# Altium PCB Exp 7.PcbDoc
Units mm, origin at the board's own origin, x right, y up, seen from the top; angles counter-clockwise.
Board outline 152.4 x 101.6 mm, 2 copper layers (Top Layer, Bottom Layer); 31 components, 37 nets, 156 pads, 0 vias.
Unrouted connection lines stored in the file: 14.
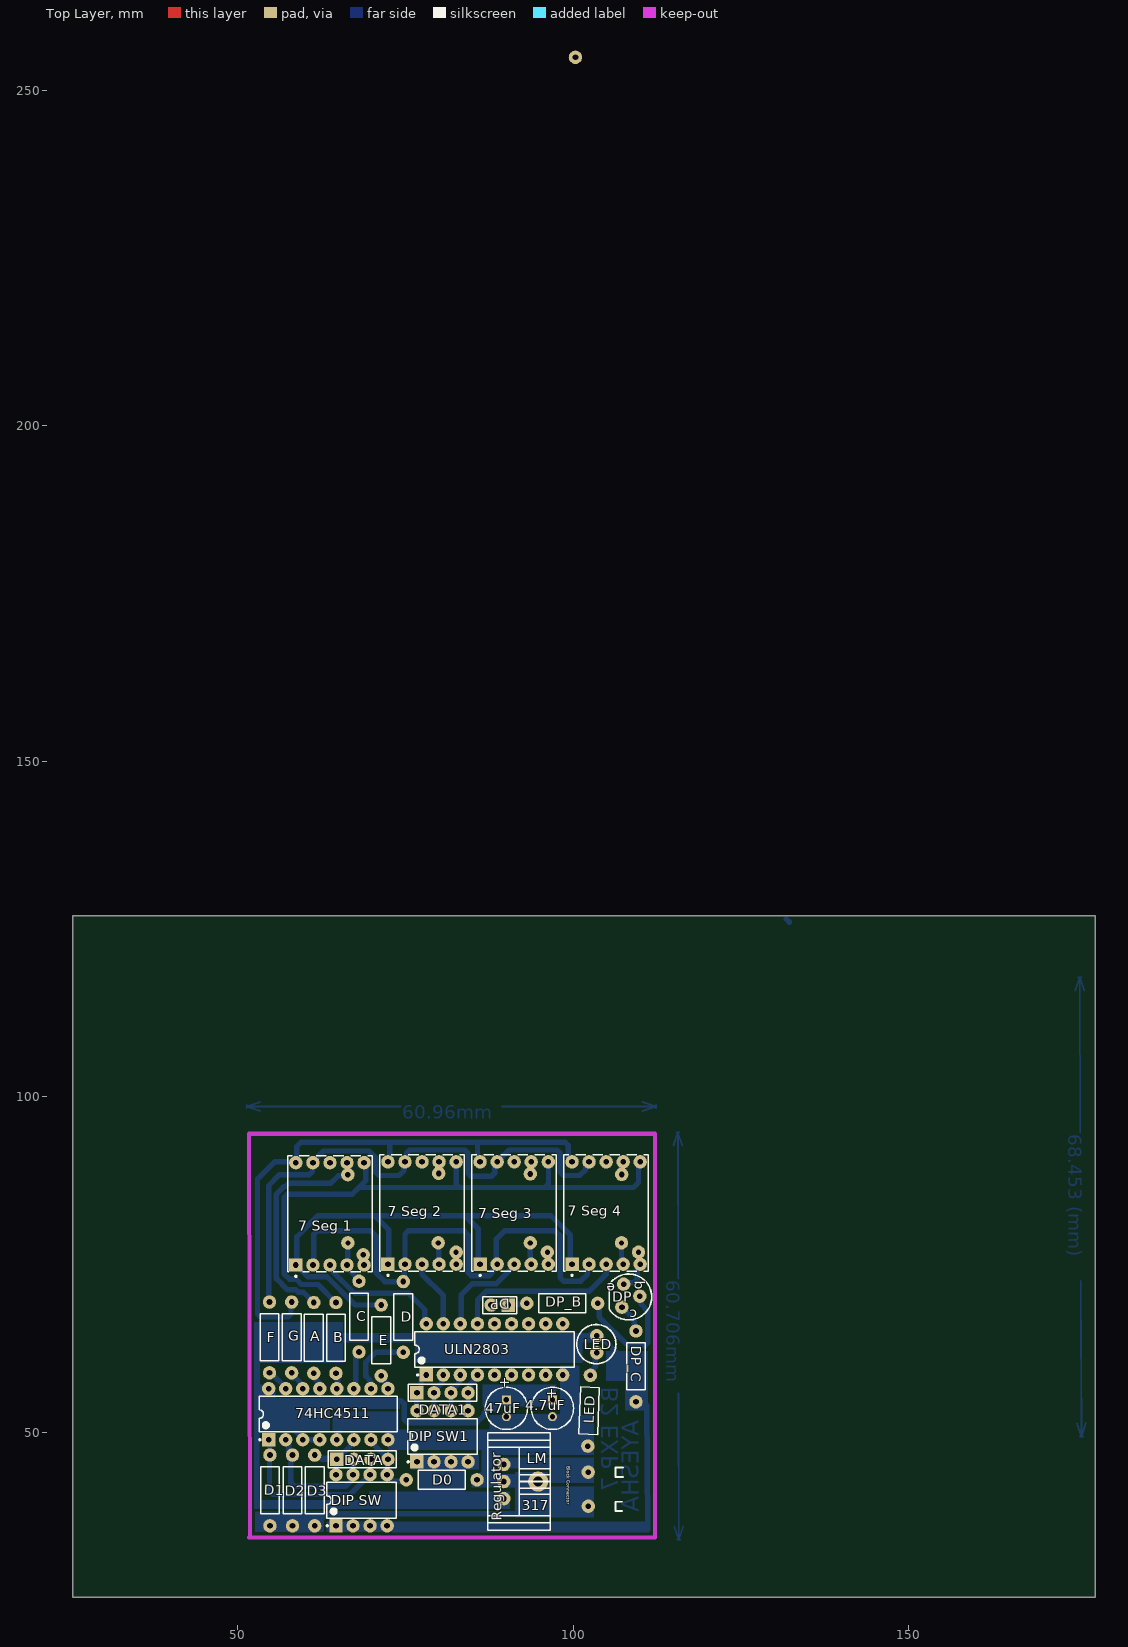
[diagram p0: Top Layer view]
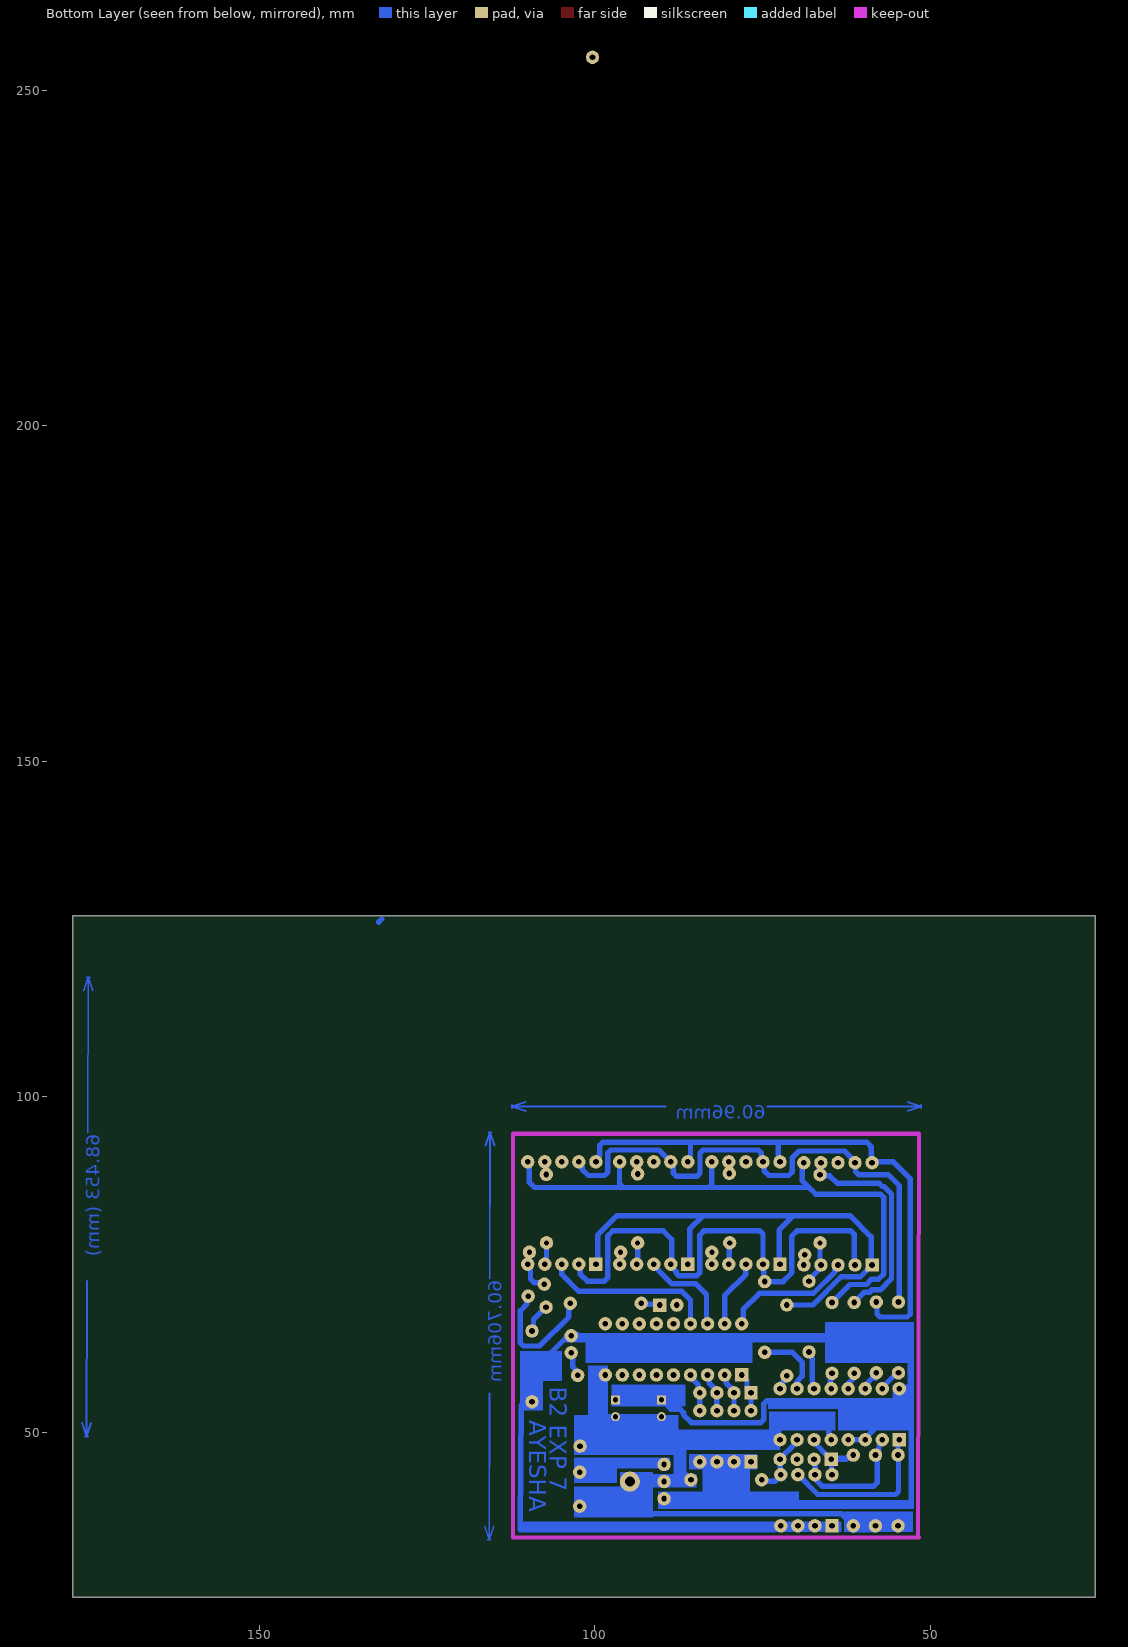
[diagram p1: Bottom Layer view, seen from below]

## Layer stack, top to bottom
Top Solder: solder mask 0.0102, Solder Resist, Dk 3.5
Top Layer: signal copper 0.0356
Dielectric 1: dielectric 0.32, FR-4, Dk 4.8
Bottom Layer: signal copper 0.0356
Bottom Solder: solder mask 0.0102, Solder Resist, Dk 3.5

## Board outline
25.4,25.4 177.8,25.4 177.8,127 25.4,127

## Design rules (kind name [scope] priority, off if disabled: settings)
Clearance [All] p1: gap=0.35 ignorepadtopadclearanceinfootprint=FALSE
PlaneClearance [All] p1: clearance=0.85
PolygonConnect [All] p1: connectstyle=Direct reliefconductorwidth=0.254 reliefentries=4 polygonreliefangle="90 Angle" airgapwidth=0.254
RoutingVias [All] p1: holewidth=0.711 width=1.27 viastyle="Through Hole" minholewidth=0.711 minwidth=1.27 maxholewidth=0.711 maxwidth=1.27
SolderMaskExpansion [All] p1: expansion=0.102 istentingtop=FALSE
Width [All] p1: maxlimit=0.8 minlimit=0.8 preferedwidth=0.8
29 further rules are at their usual default settings.

## Components (designator, comment, footprint, x,y, rotation, side; value= is the part's Value field where it differs from the comment)
4.7uF "Comment" CAPPR2.5-6.3x15 96.901,53.574 r270 top
"7 Seg 1" "Comment" LEDDIP-10/14.27RHD 63.75,82.55 r0 top
"7 Seg 2" "Comment" LEDDIP-10/14.27RHD 77.47,82.677 r0 top
"7 Seg 3" "Comment" LEDDIP-10/14.27RHD 91.2,82.677 r0 top
"7 Seg 4" "Comment" LEDDIP-10/14.27RHD 104.902,82.677 r0 top
47uF "Comment" CAPPR2.5-6.3x15 90.043,53.574 r270 top
74HC4511 "Comment" DIP-16 63.5,52.7 r90 top
A "Comment" RES10.55-7X2.8#1 61.341,64.067 r90 top
B "Comment" RES10.55-7X2.8#1 64.643,64.067 r90 top
C "Comment" RES10.55-7X2.8#1 68.072,67.25 r90 top
D "Comment" RES10.55-7X2.8#1 74.676,67.183 r90 top
D0 "Comment" RES10.55-7X2.8#1 80.391,42.926 r0 top
D1 "Comment" RES10.55-7X2.8#1 54.8,41.338 r270 top
D2 "Comment" RES10.55-7X2.8#1 58.166,41.33 r90 top
D3 "Comment" RES10.55-7X2.8#1 61.468,41.33 r90 top
DATA "Comment" HDR1X4 64.77,45.974 r0 top
DATA1 "Comment" HDR1X4 76.708,55.88 r0 top
"DIP SW" "Comment" DIP-8 68.453,39.878 r90 top
"DIP SW1" "Comment" DIP-8 80.518,49.403 r90 top
DP "Comment" HDR1X2 90.297,68.961 r180 top
DP "Comment" "TO-92 Packaging" 108.585,70.358 r180 top
DP_B "Comment" RES10.55-7X2.8#1 98.357,69.215 r180 top
DP_C "Comment" RES10.55-7X2.8#1 109.347,59.817 r270 top
E "Comment" RES10.55-7X2.8#1 71.374,63.695 r90 top
F "Comment" RES10.55-7X2.8#2 54.737,64.135 r90 top
G "Comment" RES10.55-7X2.8#3 58.039,64.135 r90 top
LED "Comment" RES10.55-7X2.8#1 102.362,53.213 r88 top
LED "Comment" LED 103.505,63.119 r180 top
Regulator "Comment" "LM317 with Heat Sink" 89.662,42.662 r270 top
ULN2803 "Comment" DIP-18 88.265,62.357 r90 top
? "Comment" "PCB Block Connector" 102.489,41.529 r270 top

## Footprints (in the part's own frame and the unit in brackets; to place one, negate y for a bottom-side part, rotate by r counter-clockwise, add the part's x,y. Pads: shape width x height; smd on the part's side, far side on the other; paste and mask are expansions set on the pad)
CAPPR2.5-6.3x15 [mm] "Capacitor, Electrolytic, Radial; Body 6.3 x 15 mm (Dia.xH typ); Pin Spacing 2.5 mm (typ)"
  rect 1.35x1.35 hole 0.8: 1(-1.25,0)
  round 1.35 hole 0.8: 2(1.25,0)
  silkscreen extent -3.15,-3.15 3.15,3.15
DIP-8 [mm] "DIP, 8-Pin, Row Spacing 7.62 mm, Pitch 2.54 mm"
  rect 2x2 hole 0.85: 1(-3.81,3.81)
  round 2 hole 0.85: 2(-3.81,1.27) 3(-3.81,-1.27) 4(-3.81,-3.81) 5(3.81,-3.81) 6(3.81,-1.27) 7(3.81,1.27) 8(3.81,3.81)
  silkscreen extent -3.93,-5.15 2.65,5.23, body extent -3.6,-5.15 3.6,5.15, height 5.33
DIP-16 [mm] "DIP; 16 Leads; Row Spacing 7.62 mm; Pitch 2.54 mm"
  rect 2x2 hole 0.85: 1(-3.81,8.89)
  round 2 hole 0.85: 2(-3.81,6.35) 3(-3.81,3.81) 4(-3.81,1.27) 5(-3.81,-1.27) 6(-3.81,-3.81) 7(-3.81,-6.35) 8(-3.81,-8.89) 9(3.81,-8.89) 10(3.81,-6.35) 11(3.81,-3.81) 12(3.81,-1.27) 13(3.81,1.27) 14(3.81,3.81) 15(3.81,6.35) 16(3.81,8.89)
  silkscreen extent -3.93,-10.3 2.65,10.31, body extent -3.6,-10.28 3.6,10.28, height 5.08
DIP-18 [mm] "DIP; 18 Leads; Row Spacing 7.62 mm; Pitch 2.54 mm"
  rect 2x2 hole 0.85: 1(-3.81,10.16)
  round 2 hole 0.85: 2(-3.81,7.62) 3(-3.81,5.08) 4(-3.81,2.54) 5(-3.81,0) 6(-3.81,-2.54) 7(-3.81,-5.08) 8(-3.81,-7.62) 9(-3.81,-10.16) 10(3.81,-10.16) 11(3.81,-7.62) 12(3.81,-5.08) 13(3.81,-2.54) 14(3.81,0) 15(3.81,2.54) 16(3.81,5.08) 17(3.81,7.62) 18(3.81,10.16)
  silkscreen extent -3.93,-11.85 2.65,11.85, body extent -3.6,-11.8 3.6,11.8, height 5.08
HDR1X2 [mm] "Connector; Header; 2 Position"
  rect 2x2 hole 0.85: 1(0,0)
  round 2 hole 0.85: ""(2.54,0)
  silkscreen extent -1.27,-1.27 3.81,1.27
HDR1X4 [mm] "Connector; Header; 4 Position"
  rect 2x2 hole 0.85: 1(0,0)
  round 2 hole 0.85: 2(2.54,0) 3(5.08,0) 4(7.62,0)
  silkscreen extent -1.27,-1.27 8.89,1.27
LED [mm]
  round 2 hole 0.85: 1(0,1.27) 2(0,-1.27)
  silkscreen extent -2.87,-2.95 2.98,2.89
LEDDIP-10/14.27RHD [mm] "LED, 7-Segment Display, 14.27 mm, RHD; 10 Leads; Row Space 15.24 mm; Pitch 2.54 mm"
  rect 2x2 hole 0.85: 1(-5.08,-7.62)
  round 2 hole 0.85: 2(-2.54,-7.62) 3(0,-7.62) 4(2.54,-7.62) 5(5.08,-7.62) 6(5.08,7.62) 7(2.54,7.62) 8(0,7.62) 9(-2.54,7.62) 10(-5.08,7.62)
  silkscreen extent -6.3,-9.42 6.3,8.65, body extent -6.3,-8.65 6.3,8.65, height 8.3
"LM317 with Heat Sink" [mm]
  round 2 hole 0.7 slot 0.8 at 0 deg: adj(-2.55,0) in(2.55,0) out(0,0)
  round 3 hole 1.5: out(0,5.1)
  silkscreen extent -7.25,-2.4 7.25,6.9
"PCB Block Connector" [mm]
  round 2 hole 0.85: 1(-2.54,-0.254) 2(2.54,-0.24)
  silkscreen extent -3.22,3.82 3.25,4.96, body extent -5,-5.45 5.03,4.96, height 5.08
RES10.55-7X2.8#1 [mm] "Resistor, Axial; Body 7 x 2.8 mm (LxDia. max), Lead Dia. 0.65 mm (max)"
  round 2 hole 0.85: 1(-5.275,0) 2(5.275,0)
  silkscreen extent -3.5,-1.4 3.5,1.4
RES10.55-7X2.8#2 [mm] "Resistor, Axial; Body 7 x 2.8 mm (LxDia. max), Lead Dia. 0.65 mm (max)"
  round 2 hole 0.85: ""(-5.275,0) ""(5.275,0)
  silkscreen extent -3.5,-1.4 3.5,1.4
RES10.55-7X2.8#3 [mm] "Resistor, Axial; Body 7 x 2.8 mm (LxDia. max), Lead Dia. 0.65 mm (max)"
  round 2 hole 0.85: 1(-5.275,0) ""(5.275,0)
  silkscreen extent -3.5,-1.4 3.5,1.4
"TO-92 Packaging" [mm] "for 2N3904"
  round 2 hole 0.85: T(-1.333,0.063) T(1.08,-1.714) T(1.334,1.714)
  silkscreen extent -3.1,-3.23 3.22,3.61

## Free pads (board coordinates)
  round 2 hole 0.85: 2(100.33,254.889) 3(66.421,88.392) 4(79.943,88.579) 5(93.603,88.503) 6(107.22,88.424)
  round 2 hole 0.762: 13(82.55,76.835) 14(96.139,76.835) 15(109.728,76.835) 26(68.707,76.454) 28(79.883,78.23) 29(66.421,78.23) 30(93.599,78.23) 31(107.188,78.23)

## Nets (pads, with @x,y where several pads share a name; then routed paths per layer and width w, separated by ;. In a path a pad name is that pad's centre, name@x,y a point inside that pad or via, vN(x,y) a via of type N, cw(c..) or ccw(c..) an arc to the next point about the centre after c; other vN are vias at no path point)
A: "7 Seg 1.7" "7 Seg 2.7" "7 Seg 3.7" "7 Seg 4.7" A.2 pad.3 pad.4 pad.5 pad.6 | length 40.5
  Bottom Layer w0.8: A.2 61.306,69.342 59.768,70.88 59.044,70.88 58.693,71.231 57.429,71.231 55.77,72.89 55.77,85.479 56.912,86.621 57.151,86.621 57.652,87.122 63.884,87.122 64.982,88.221 66.25,88.221 pad.3 66.674,90.156 ; pad.4@79.819,88.456 pad.4@80.067,88.703 ; pad.4 79.629,88.59 79.971,88.932 79.971,90.004 80.2,90.233 ; 93.599,90.297 93.479,90.177 93.479,88.487 pad.5 ; 93.726,90.297 93.86,90.163 ; pad.6@106.822,88.368 pad.6@107.061,88.607 ; 107.188,90.297 107.124,90.233 107.124,88.328 pad.6
a_: 74HC4511.13 A.1 | length 3
  Bottom Layer w0.8: A.1@61.531,58.289 61.468,58.352 61.468,58.027 62.254,57.241 62.254,56.618 62.254,56.237 74HC4511.13@62.484,56.007 ; 74HC4511.13@62.635,56.618 74HC4511.13@62.762,56.491
B: "7 Seg 1.6" "7 Seg 2.6" "7 Seg 3.6" "7 Seg 4.6" B.2 | length 90
  Bottom Layer w0.8: B.2@64.54,69.247 64.54,69.445 61.955,72.03 59.52,72.03 58.726,72.825 57.715,72.825 56.92,73.619 56.92,85.002 57.389,85.471 67.056,85.471 68.072,86.487 ; 68.961,90.17 69.088,90.043 69.088,87.503 68.072,86.487 ; 82.55,90.297 82.55,86.956 83.019,86.487 ; 96.139,90.297 96.316,90.12 96.316,87.045 95.758,86.487 ; 109.728,90.297 109.728,87.249 108.966,86.487 95.758,86.487 ; 68.072,86.487 83.019,86.487 ; 83.019,86.487 95.758,86.487
b_: 74HC4511.12 B.1 | length 3.1
  Bottom Layer w0.8: B.1@64.54,58.122 64.77,58.352 64.897,58.225 64.897,56.134 74HC4511.12@65.024,56.007 ; 74HC4511.12@65.048,56.491 74HC4511.12@65.048,56.815
C: "7 Seg 1.4" "7 Seg 2.4" "7 Seg 3.4" "7 Seg 4.4" C.2 pad.28 pad.29 pad.30 pad.31 | length 16.3
  Bottom Layer w0.8: pad.29 66.421,74.93 66.651,74.7 66.651,74.148 68.072,72.726 C.2@68.072,72.458 ; pad.28 79.947,78.167 79.947,75.12 80.01,75.057 ; 93.599,75.057 pad.30 ; pad.31 107.188,75.057 107.379,75.248
C1: "DIP SW1.8" DATA1.1 ULN2803.1 | length 5.9
  Bottom Layer w0.8: 76.708,53.213 DATA1.1 77.308,56.48 77.308,57.75 ULN2803.1
C2: "DIP SW1.7" DATA1.2 ULN2803.2 | length 5.9
  Bottom Layer w0.8: 79.248,53.213 DATA1.2 79.248,56.205 80.415,57.372 80.415,58.317 ULN2803.2
C3: "DIP SW1.6" DATA1.3 ULN2803.3 | length 5.9
  Bottom Layer w0.8: 81.788,53.213 DATA1.3 81.788,56.205 82.955,57.372 82.955,58.317 ULN2803.3
C4: "DIP SW1.5" DATA1.4 ULN2803.4 | length 5.9
  Bottom Layer w0.8: 84.328,53.213 DATA1.4 84.558,56.11 84.558,57.055 85.725,58.222 ULN2803.4
c_: 74HC4511.11 C.1 | length 5.7
  Bottom Layer w0.8: 74HC4511.11@67.588,56.491 67.564,56.515 67.564,61.075 C.1@68.338,61.849
COM1: "7 Seg 1.3" "7 Seg 1.8" ULN2803.18 | length 19.4
  Bottom Layer w0.8: 63.75,74.93 63.75,74.605 64.227,74.129 64.227,73.895 67.402,70.72 72.099,70.72 72.111,70.708 75.463,70.708 77.875,68.296 77.875,66.397 ULN2803.18
COM2: "7 Seg 2.3" "7 Seg 2.8" ULN2803.17 | length 10.2
  Bottom Layer w0.8: 77.47,75.057 77.47,73.533 80.645,70.358 ULN2803.17
COM3: "7 Seg 3.3" "7 Seg 3.8" ULN2803.16 | length 14.2
  Bottom Layer w0.8: ULN2803.16 83.333,66.315 83.333,70.506 84.984,72.157 88.54,72.157 90.494,74.111 90.494,74.167 91.059,74.732 91.059,75.057
COM4: "7 Seg 4.3" "7 Seg 4.8" ULN2803.15 | length 25.8
  Bottom Layer w0.8: ULN2803.15 85.725,69.723 87.009,71.007 102.376,71.007 104.902,73.533 104.902,75.057
D: "7 Seg 1.2" "7 Seg 2.2" "7 Seg 3.2" "7 Seg 4.2" D.2 | length 79.3
  Bottom Layer w0.8: 61.341,74.93 61.341,79.541 61.81,80.01 69.85,80.01 70.64,79.22 70.64,73.746 71.928,72.458 D.2 74.803,72.585 74.803,74.93 74.93,75.057 74.93,79.541 75.399,80.01 83.735,80.01 83.735,79.982 84.37,79.347 84.37,73.746 84.809,73.307 87.431,73.307 87.87,73.746 87.87,73.942 88.66,74.732 88.66,75.057 ; 88.519,75.057 88.519,78.74 89.789,80.01 97.31,80.01 98.072,79.248 98.072,72.986 98.541,72.517 101.103,72.517 102.132,73.546 102.132,74.827 102.362,75.057
D0: 74HC4511.7 "DIP SW.5" D0.1 DATA.4 | length 9.4
  Bottom Layer w0.8: 74HC4511.7@70.104,48.387 70.104,48.323 DATA.4@72.358,46.069 ; 72.263,43.307 72.39,43.434 ; DATA.4@72.326,45.974 72.326,46.038 DATA.4@72.358,46.069 ; D0.1 74.886,42.696 73.176,42.696 73.152,42.672 72.39,43.434 ; DATA.4@72.358,46.069 72.39,46.038 DATA.4 72.326,45.91 72.326,43.752 72.263,43.688 72.263,43.561 72.39,43.434
D1: 74HC4511.1 "DIP SW.6" D1.1 DATA.3 | length 23.5
  Bottom Layer w0.8: D1.1@54.737,46.55 D1.1 54.8,48.323 74HC4511.1@54.864,48.387 ; D1.1@54.864,46.355 54.737,46.228 54.737,41.198 55.206,40.729 66.764,40.729 69.723,43.688
D2: 74HC4511.2 "DIP SW.7" D2.2 DATA.2 | length 18.6
  Bottom Layer w0.8: 74HC4511.2@57.404,48.387 57.634,48.157 57.634,47.28 D2.2@58.039,46.875 ; D2.2@58.166,46.931 58.166,46.733 57.912,46.479 57.912,42.506 58.48,41.938 66.068,41.938 67.12,42.989 67.12,45.276 DATA.2@67.056,45.339
D3: 74HC4511.6 "DIP SW.8" D3.2 DATA.1 | length 13.8
  Bottom Layer w0.8: D3.2@61.468,46.296 61.629,46.135 62.409,46.135 ; D3.2@61.468,46.804 61.74,46.804 62.409,46.135 ; 64.36,43.688 64.643,43.688 64.706,43.752 64.706,45.91 DATA.1 ; 74HC4511.6@67.588,48.871 67.588,48.792 DATA.1 ; 62.409,46.135 64.609,46.135 DATA.1 ; 62.409,46.135 62.57,45.974 DATA.1
d_: 74HC4511.10 D.1 | length 10.6
  Bottom Layer w0.8: 74HC4511.10@70.128,56.491 69.899,56.72 69.899,57.42 69.624,57.695 69.624,57.831 69.088,58.367 69.088,60.449 70.547,61.908 D.1
DP: "7 Seg 1.5" "7 Seg 2.5" "7 Seg 3.5" "7 Seg 4.5" DP.T@107.505,72.072 pad.13 pad.14 pad.15 pad.26 | length 11.5
  Bottom Layer w0.8: pad.26 68.961,74.93 ; 82.55,75.057 pad.13 ; 96.139,75.057 pad.14 ; DP.T@107.505,72.072 107.696,72.263 108.966,72.263 109.56,72.857 109.56,74.889 109.728,75.057 pad.15
DP_B: DP.T@109.918,70.294 DP_B.1 | length 18.8
  Bottom Layer w0.8: DP_B.1 103.862,68.985 103.862,67.207 108.216,62.853 110.616,62.853 111.097,63.334 111.097,68.1 110.148,69.049 110.148,70.065 DP.T@109.918,70.294
DP_C: DP.T@107.251,68.644 DP_C.1 | length 4.4
  Bottom Layer w0.8: DP.T@107.251,68.644 109.117,66.778 109.117,65.322 DP_C.1
DP_SW: DP.1 DP_B.2 | length 3.3
  Bottom Layer w0.8: DP.1@90.17,68.961 DP.1@90.233,69.025 ; DP.1 90.424,69.088 92.955,69.088 DP_B.2 ; DP_B.2@92.671,69.625 DP_B.2@92.896,69.85
E: "7 Seg 1.1" "7 Seg 2.1" "7 Seg 3.1" "7 Seg 4.1" E.2 | length 83.3
  Bottom Layer w0.8: 58.67,74.93 60.42,73.18 63.28,73.18 67.49,68.97 E.2 ; 58.801,74.93 58.801,79.121 61.976,82.296 70.358,82.296 ; 72.39,75.057 72.517,75.184 72.517,80.137 70.358,82.296 ; 85.979,75.057 85.852,75.184 85.852,80.264 83.82,82.296 ; 99.568,75.057 99.568,79.378 96.65,82.296 83.82,82.296 ; 70.358,82.296 83.82,82.296
e_: 74HC4511.9 E.1 | length 2.7
  Bottom Layer w0.8: E.1 71.374,58.102 72.668,56.808 72.668,56.491 74HC4511.9@72.927,56.491
F: "7 Seg 1.9" "7 Seg 2.9" "7 Seg 3.9" "7 Seg 4.9" F.@54.737,69.41 | length 83.9
  Bottom Layer w0.8: F.@54.864,69.41 54.61,69.664 54.61,86.741 56.261,88.392 60.67,88.392 61.139,88.861 61.139,90.293 62.766,91.92 69.555,91.92 70.58,90.895 70.58,88.769 71.084,88.265 74.041,88.265 74.746,88.97 74.746,90.113 74.93,90.297 ; 75.16,90.299 75.16,91.606 75.628,92.075 83.852,92.075 84.321,91.606 84.321,88.607 84.79,88.138 87.821,88.138 88.289,88.607 88.289,90.067 88.519,90.297 88.66,90.297 90.431,92.068 97.603,92.068 98.072,91.599 98.072,88.734 98.541,88.265 100.965,88.265 101.878,89.178 101.878,89.489 102.132,89.743 102.132,90.273
f_: 74HC4511.15 F.@54.737,58.86 | length 4.3
  Bottom Layer w0.8: F.@54.864,58.86 54.994,58.86 57.363,56.491 74HC4511.15@57.428,56.491 ; 74HC4511.15@57.174,56.491 57.174,56.237 74HC4511.15@57.404,56.007 ; 74HC4511.15@57.555,56.618 74HC4511.15@57.682,56.491
G: "7 Seg 1.10" "7 Seg 2.10" "7 Seg 3.10" "7 Seg 4.10" G. | length 85.8
  Bottom Layer w0.8: G.@58.166,68.902 57.983,68.902 57.936,68.856 57.936,67.652 57.468,67.183 53.428,67.183 52.959,67.652 52.959,87.757 55.499,90.297 58.674,90.297 58.801,90.17 58.801,92.583 59.436,93.218 72.517,93.218 ; 72.644,90.17 72.644,93.091 72.517,93.218 ; 85.725,90.17 85.725,93.218 ; 99.592,90.448 99.592,90.851 99.326,91.118 99.326,91.312 99.273,91.366 99.273,92.749 98.804,93.218 85.725,93.218 ; 72.517,93.218 72.524,93.225 85.718,93.225 85.725,93.218
g_: 74HC4511.14 G.1 | length 4.5
  Bottom Layer w0.8: G.1@58.166,58.068 58.166,58.352 G.1@58.396,58.122 ; G.1@58.166,58.86 58.166,58.576 59.968,56.774 74HC4511.14@59.968,56.491 ; 74HC4511.14@59.856,56.378 74HC4511.14@59.944,56.29 ; 74HC4511.14@59.877,56.399 59.944,56.332 74HC4511.14@59.944,56.29 ; 74HC4511.14@59.944,56.007 74HC4511.14@59.944,56.29 ; 74HC4511.14@60.086,56.149 60.198,56.037 74HC4511.14@60.198,56.007
GND: 4.7uF.2 47uF.2 74HC4511.5 74HC4511.8 ?.2 D0.2 D1.2 D2.1 D3.1 LED.1@102.178,47.941 Regulator.out ULN2803.9 | length 111.1
  Bottom Layer w0.8: D1.2@54.8,35.487 54.864,35.551 58.039,35.551 58.102,35.615 58.229,35.488 61.277,35.488 61.404,35.361 D3.1@61.58,35.361 ; D3.1@61.643,36.254 63.247,37.858 94.663,37.858 94.996,38.191 ; 74HC4511.5@65.048,48.871 65.099,48.921 65.099,50.331 65.568,50.8 72.073,50.8 72.541,50.331 72.541,48.998 72.668,48.871 86.59,48.871 87.249,49.53 ; D0.2 87.249,44.509 87.249,49.53 ; Regulator.out@89.317,43.053 Regulator.out@94.742,43.053 ; Regulator.out@94.996,43.053 94.996,38.191 ; ?.2 95.794,38.989 94.996,38.191 ; LED.1@102.255,48.045 102.255,50.138 100.069,52.324 4.7uF.2 47uF.2 87.249,49.53
Input: ?.1 Regulator.adj | length 13.3
  Bottom Layer w0.8: Regulator.adj@89.896,45.603 100.912,45.603 102.446,44.069 102.489,44.069 ?.1@102.425,44.133
LED_R: LED.1@103.505,61.849 LED.2@102.546,58.485 | length 3.8
  Bottom Layer w0.8: LED.2@102.362,58.488 102.362,58.813 103.275,59.726 103.275,61.619 LED.1@103.505,61.849
M_B: 
M_C: 
M_SW: 
VCC: 4.7uF.1 47uF.1 74HC4511.3 74HC4511.4 74HC4511.16 "DIP SW1.1" "DIP SW1.2" "DIP SW1.3" "DIP SW1.4" "DIP SW.1" "DIP SW.2" "DIP SW.3" "DIP SW.4" DP_C.2 LED.2@103.505,64.389 Regulator.in | length 183.2
  Bottom Layer w0.8: 52.978,39.243 61.976,39.243 ; 53.21,56.469 52.959,56.72 52.959,62.633 55.096,64.77 ; 53.213,56.472 53.232,56.491 54.888,56.491 54.888,53.951 74HC4511.3@59.968,48.871 ; 55.734,54.718 74.334,54.718 74.803,54.249 74.803,51.904 75.272,51.435 85.598,51.435 86.753,52.59 86.753,52.889 87.319,53.454 88.673,53.454 47uF.1 ; 74HC4511.3@60.222,48.871 74HC4511.4@62.508,48.871 ; 61.783,39.436 77.724,39.436 ; 63.075,53.359 63.944,54.229 64.229,53.945 ; 64.643,36.068 67.183,36.068 69.723,36.068 72.263,36.068 72.588,36.068 73.202,35.454 111.117,35.454 111.117,36.257 110.974,53.999 110.743,54.23 110.661,54.312 ; 77.47,39.69 77.724,39.436 ; Regulator.in@89.896,40.178 89.154,39.436 77.724,39.436 ; 47uF.1@90.023,54.844 47uF.1@90.478,55.299 ; LED.2@102.588,64.619 103.275,64.619 103.505,64.389 103.735,64.159 104.243,64.159 106.553,61.849 106.553,60.96 109.728,57.785 110.546,57.785 110.546,54.483 109.406,54.483 DP_C.2
pads on no net: DP. ULN2803.5 ULN2803.6 ULN2803.7 ULN2803.8 ULN2803.10 ULN2803.11 ULN2803.12 ULN2803.13 ULN2803.14
copper on no net: | length 164.8
  Bottom Layer w0.254: 51.367,98.298 51.367,98.806 ; 53.367,97.885 51.367,98.552 ; 53.367,99.219 51.367,98.552 ; 74.295,98.552 51.367,98.552 ; 89.399,98.552 112.327,98.552 ; 110.327,97.885 112.327,98.552 ; 110.327,99.219 112.327,98.552 ; 112.327,98.298 112.327,98.806 ; 114.935,92.71 115.597,94.711 ; 115.054,36.004 115.724,34.005 ; 115.343,94.711 115.851,94.712 ; 115.47,34.005 115.978,34.006 ; 115.643,72.91 115.597,94.711 ; 115.679,55.807 115.724,34.005 ; 116.268,92.713 115.597,94.711 ; 116.387,36.007 115.724,34.005 ; 174.816,115.819 175.475,117.822 ; 175.055,51.366 175.729,49.369 ; 175.221,117.821 175.729,117.822 ; 175.475,49.368 175.983,49.369 ; 175.561,94.646 175.475,117.822 ; 175.643,72.544 175.729,49.369 ; 176.149,115.824 175.475,117.822 ; 176.388,51.371 175.729,49.369
  Bottom Layer w0.8: 131.738,126.492 132.207,126.023

## Keep-outs
Keep-Out Layer:
  lines w0.6: 51.689,34.29 112.173,34.29 112.173,94.488 51.701,94.488 51.8,34.29

## Other copper
Bottom Layer:
  rectangle net VCC: 76.454,60.325 101.346,64.516
  rectangle net GND: 64.135,50.292 74.041,53.086
  rectangle net GND: 72.39,47.371 86.995,50.419
  rectangle net GND: 86.36,42.037 88.265,50.419
  rectangle net GND: 87.503,46.609 103.124,52.578
  rectangle net VCC: 107.696,53.213 111.125,62.103
  rectangle net VCC: 104.902,57.658 110.998,62.103
  rectangle net VCC: 86.487,53.848 97.536,57.15
  rectangle net GND: 98.044,51.689 100.965,59.944
  rectangle net VCC: 52.832,54.61 55.626,57.148
  rectangle net VCC: 53.594,53.467 74.168,55.118
  rectangle net VCC: 53.086,50.292 63.754,55.118
  rectangle net VCC: 52.451,38.608 53.213,66.421
  rectangle net VCC: 52.959,38.608 70.993,39.878
  rectangle net GND: 84.836,41.783 96.266,43.815
  rectangle net VCC: 69.596,38.608 90.551,41.148
  rectangle net VCC: 76.835,38.608 83.947,46.609
  rectangle net VCC: 75.819,44.45 85.979,46.736
  rectangle net GND: 91.313,37.338 103.124,41.91
  rectangle net GND: 91.313,37.338 96.266,44.069
  rectangle net Input: 96.647,42.418 103.124,45.212
  rectangle net Input: 88.773,44.577 103.124,46.228
  rectangle net VCC: 53.594,63.373 104.521,64.77
  rectangle net VCC: 52.832,60.325 65.659,66.421
  rectangle net VCC: 63.246,35.179 111.379,36.703
  rectangle net GND: 52.578,35.179 62.865,38.227
  text "60.96mm" at 74.549,96.752 h2
  text "68.453 (mm)" at 173.762,94.385 h2 r270.21
  text "60.706mm" at 113.844,72.652 h2 r270.12
  text "B2 EXP 7" at 106.688,56.777 h2.5 r90
  text "AYESHA" at 109.736,51.824 h2.5 r90

## Dimensions
113.792,124.841 to 173.99,124.46 on Bottom Layer

## Text inside footprints (layer, text, board x,y; h text height)
4.7uF: Top Overlay "+" at 96.139,56.642 h1.5 r270
47uF: Top Overlay "+" at 89.154,58.253 h1.5 r270
DP: Top Overlay "c" at 109.537,68.263 h1.5 r180; Top Overlay "e" at 106.236,72.2 h1.5 r180; Top Overlay "b" at 109.156,72.581 h1.52 r270
Regulator: Top Overlay "LM" at 93.062,45.412 h1.52; Top Overlay "317" at 92.362,38.362 h1.52
?: Top Overlay "Block Connector" at 99.06,44.958 h0.51 r270